# Altium PCB 24V_5V_Buck.PcbDoc
Units mil, origin at the board's own origin, x right, y up, seen from the top; angles counter-clockwise.
Board outline 1350 x 900 mil, 2 copper layers (Top Layer, Bottom Layer); 15 components, 9 nets, 45 pads, 0 vias.
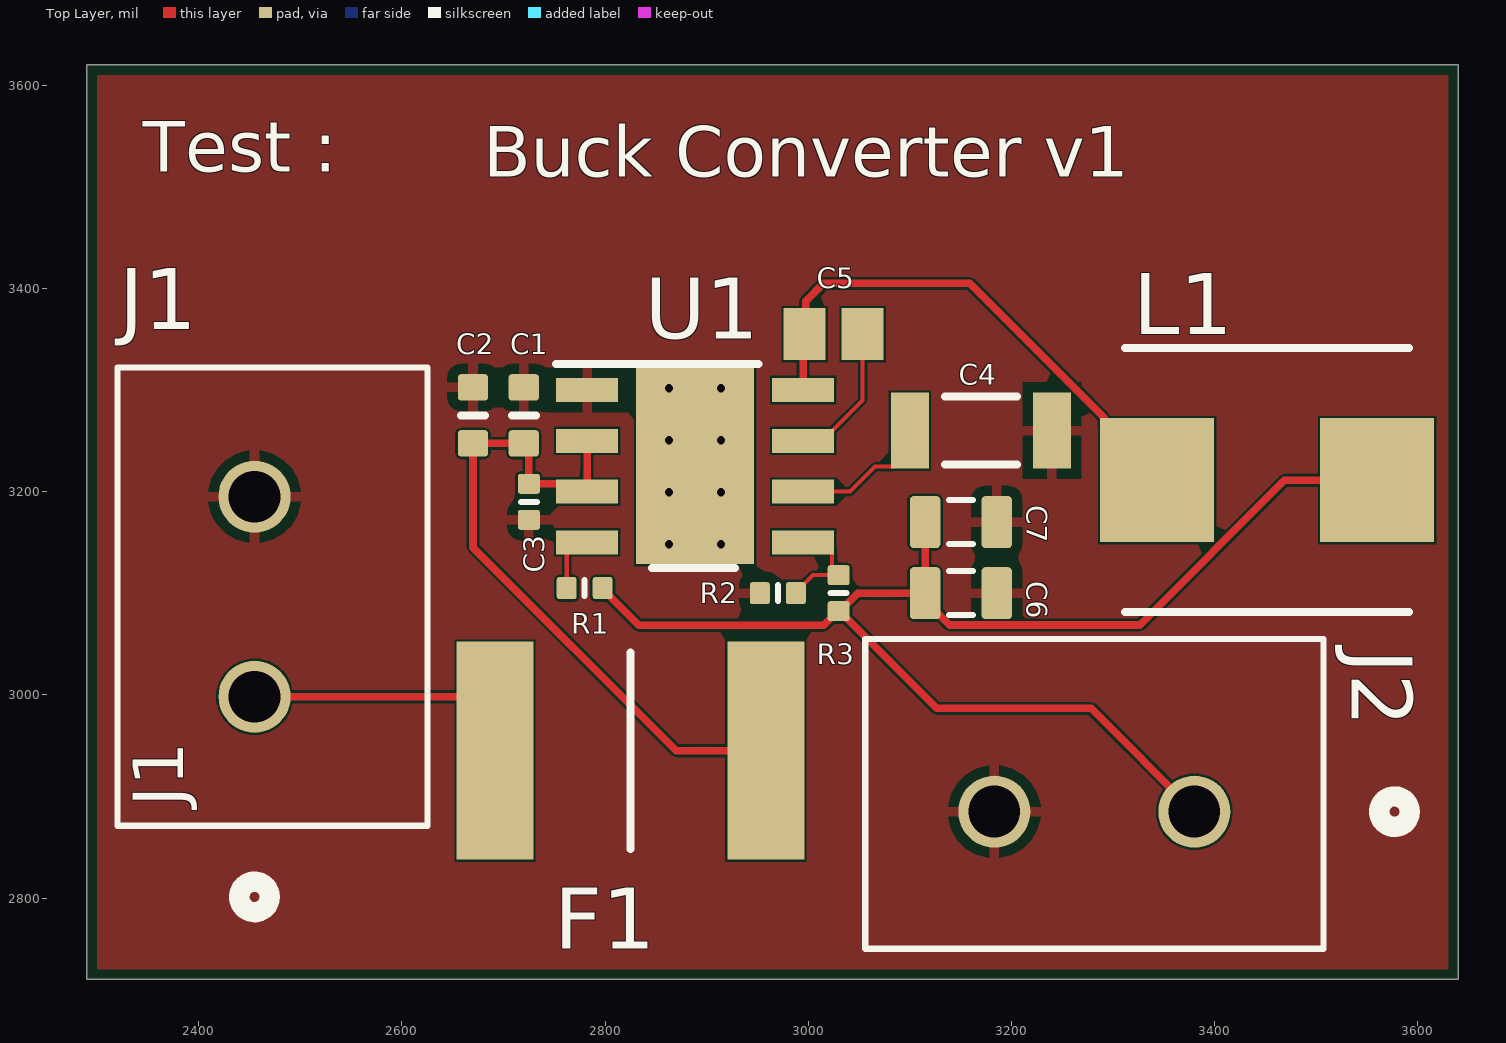
[diagram p0: Top Layer view]
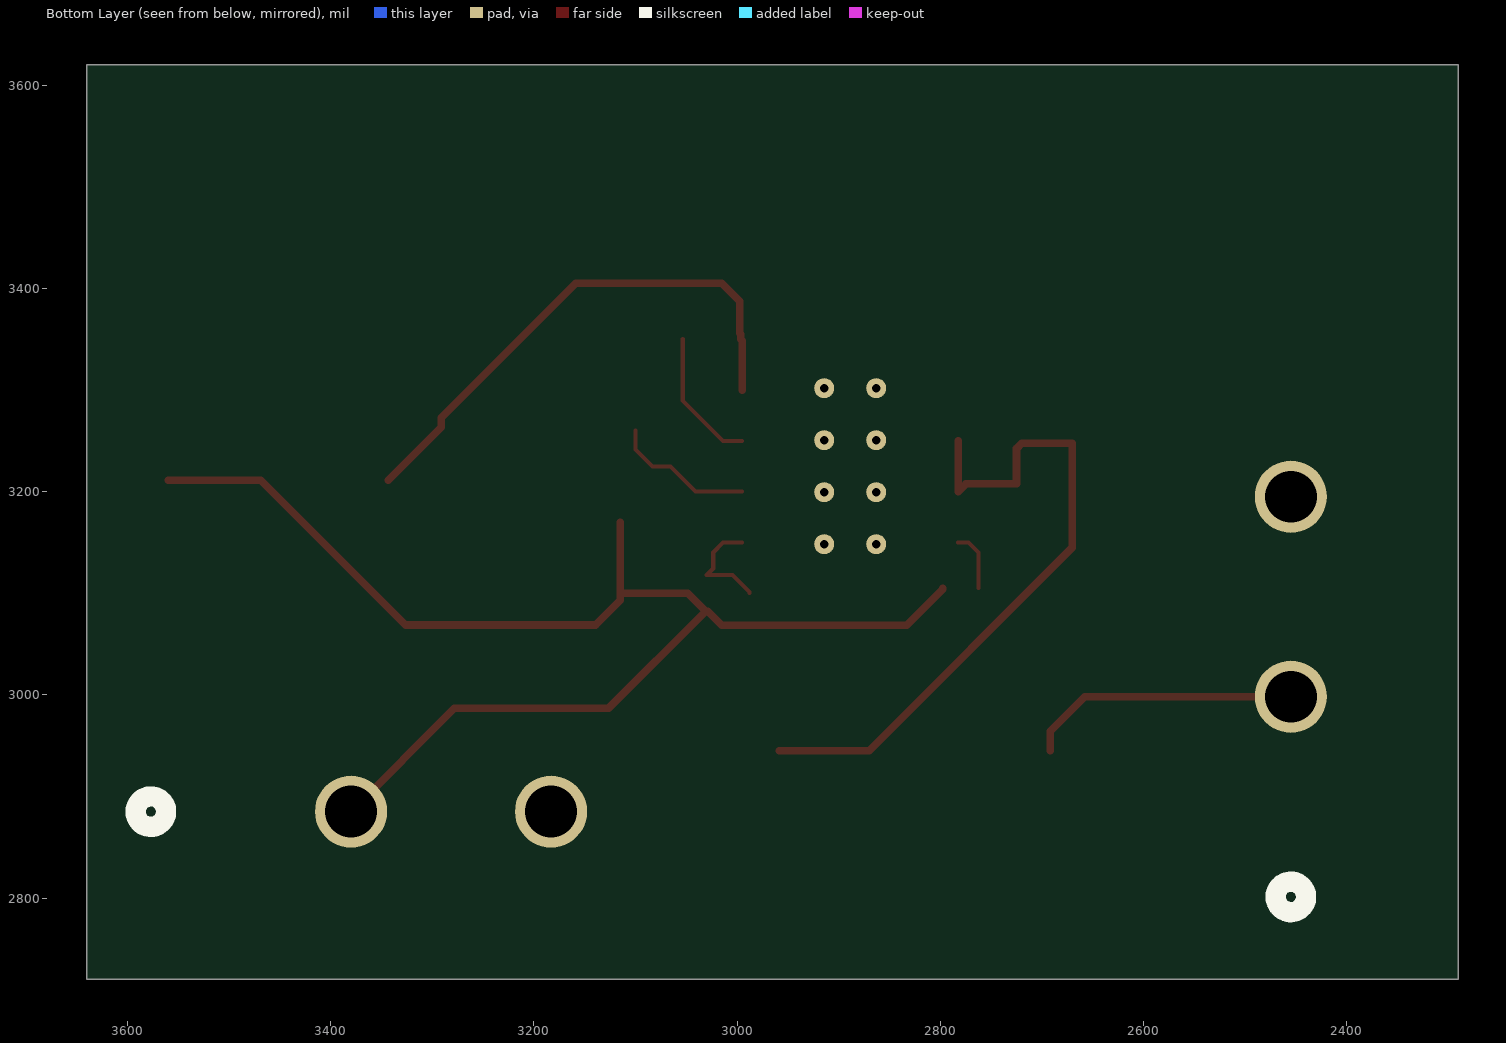
[diagram p1: Bottom Layer view, seen from below]
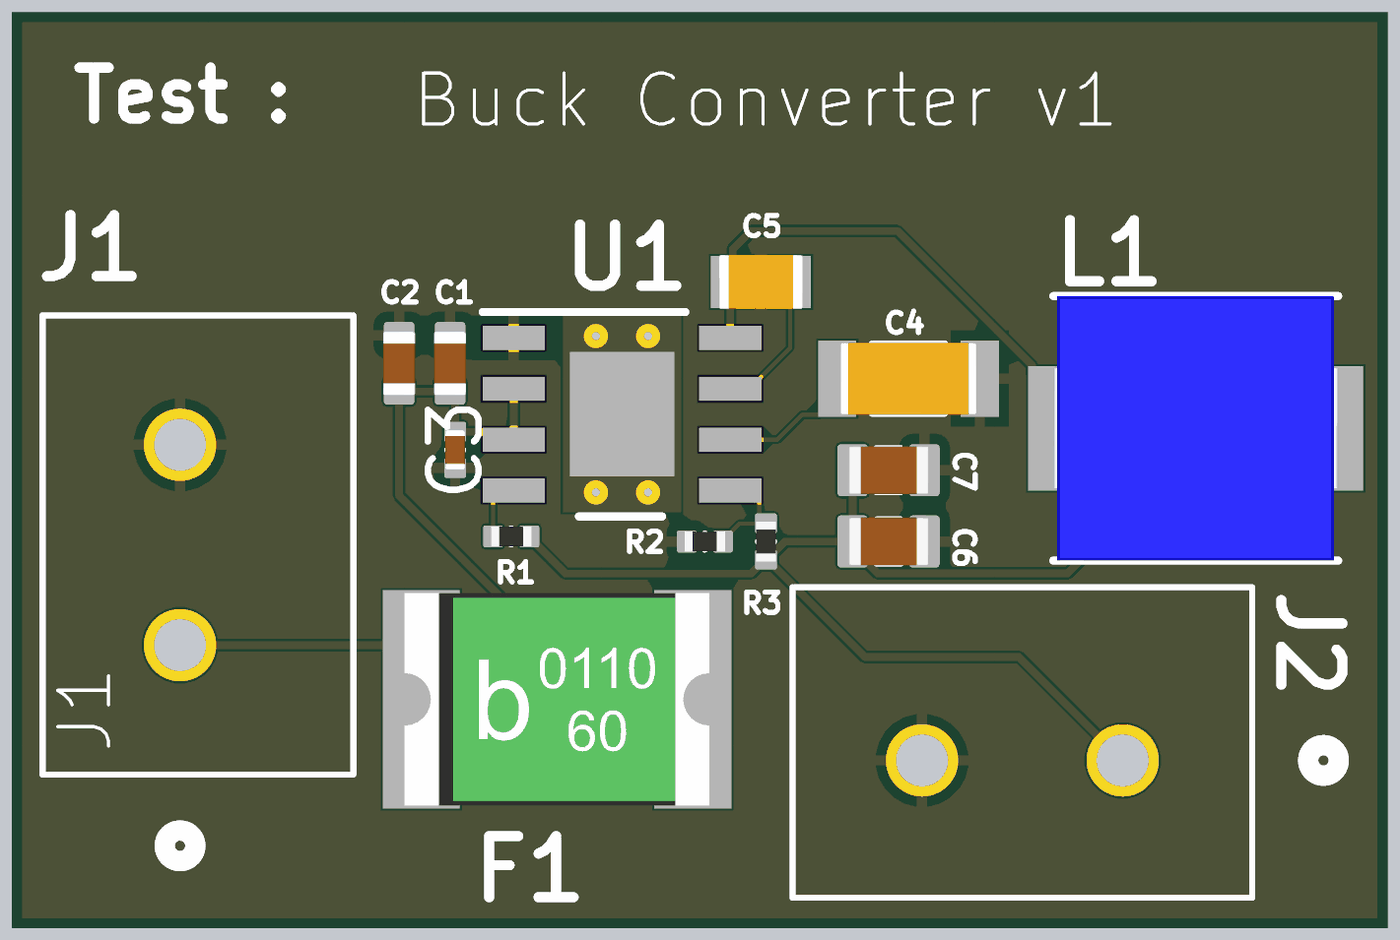
[diagram p2: 3D render of the assembled board from above, using the file's embedded part models]

## Layer stack, top to bottom
Top Solder: solder mask 0.4, Solder Resist, Dk 3.5
Top Layer: signal copper 1.4
Dielectric 1: dielectric 12.6, FR-4, Dk 4.8
Bottom Layer: signal copper 1.4
Bottom Solder: solder mask 0.4, Solder Resist, Dk 3.5

## Board outline
2290,2720 3640,2720 3640,3620 2290,3620

## Design rules (kind name [scope] priority, off if disabled: settings)
Clearance [All] p1: gap=2 ignorepadtopadclearanceinfootprint=FALSE
ComponentClearance [All] p1: gap=10 collisioncheckmode=3 verticalgap=10 showdistances=TRUE
MinimumSolderMaskSliver [All] p1: minsoldermaskwidth=3
PolygonConnect [All] p1: connectstyle=Relief reliefconductorwidth=10 reliefentries=4 polygonreliefangle="90 Angle" airgapwidth=10
RoutingVias [All] p1: holewidth=28 width=50 viastyle="Through Hole" minholewidth=28 minwidth=50 maxholewidth=28 maxwidth=50
SilkToSilkClearance [All] p1: silktosilkclearance=1
SilkToSolderMaskClearance [IsPad] p1: minsilkscreentomaskgap=1 clearancetoexposedcopper=TRUE
SolderMaskExpansion [All] p1: expansion=0 istentingtop=FALSE
SupplyNets "Schematic Supply Nets" [InNet('GND')] p1: voltage=0.000
Width Power [(InNet('NetF1_1') OR InNet('NetC6_1')) OR InNet('NetC1_1')] p1: maxlimit=20 minlimit=7.5 preferedwidth=12.5 minimp=50.000000 maximp=50.000000 favimp=50.000000
Width SW [InNet('NetC5_2')] p2: maxlimit=12.5 minlimit=5 preferedwidth=7.5 minimp=50.000000 maximp=50.000000 favimp=50.000000
Width [InNetClass('All Nets')] p3: maxlimit=4 minlimit=1.5 preferedwidth=2.5 minimp=50.000000 maximp=50.000000 favimp=50.000000
26 further rules are at their usual default settings.

## Components (designator, comment, footprint, x,y, rotation, side; value= is the part's Value field where it differs from the comment)
C1 "Capacitor 4.7µF +/-20% 10V 0603" CAPC0603(1608)100_L 2720,3275 r90 top value=4.7µF
C2 "Capacitor 4.7µF +/-20% 10V 0603" CAPC0603(1608)100_L 2670,3275 r90 top value=4.7µF
C3 "Capacitor 220nF +/-20% 10V 0402" CAPC0402(1005)60_L 2725,3190 r270 top value=220nF
C4 "Capacitor 1 uF +/- 10% 25 V 1206" CAPC3216X180X20ML20 3169.88,3260 r0 top value=1µF
C5 "Capacitor 100 nF +/-10% 50 V 0805" CAPC2013X95X50LL10T25 3025,3355 r180 top value=100nF
C6 "Capacitor 22µF +/-40% 16V 0805" CAPC0805(2012)145_L 3150.43,3100 r0 top value=22µF
C7 "Capacitor 22µF +/-40% 16V 0805" CAPC0805(2012)145_L 3150.43,3170 r0 top value=22µF
F1 "0ZCF0110AF2A" FUSC7451X170N 2825,2945 r0 top
J1 "Terminal Block" CONN2_2710002_WRE 2455,2998.15 r90 top
J2 "Terminal Block" CONN2_2710002_WRE 3380,2885 r180 top
L1 "SRP7028AA-100M" INDPM7166X300N 3451.74,3211.19 r0 top
R1 "Resistor 100K +/-1 % 0402 63 mW" RESC0402(1005)_L 3030,3100 r270 top value=100k
R2 "Resistor 100K +/-1 % 0402 63 mW" RESC0402(1005)_L 2970,3100 r180 top value=24.9k
R3 "Resistor 100K +/-1 % 0402 63 mW" RESC0402(1005)_L 2780,3105 r0 top value=100k
U1 "LMR36520FADDAR" DDA0008J 2888.7,3225 r0 top

## Footprints (in the part's own frame and the unit in brackets; to place one, negate y for a bottom-side part, rotate by r counter-clockwise, add the part's x,y. Pads: shape width x height; smd on the part's side, far side on the other; paste and mask are expansions set on the pad)
CAPC0402(1005)60_L [mm] "Chip Capacitor, Body 1.0x0.5mm, Height 0.6mm, IPC High Density"
  rrect25% 0.5x0.55 smd: 1(-0.45,0) 2(0.45,0)
  silkscreen extent 0,-0.2 0,0.2, body extent -0.5,-0.25 0.5,0.25, height 0.6
CAPC0603(1608)100_L [mm] "Chip Capacitor, Body 1.6x0.8mm, Height 1.0mm, IPC High Density"
  rrect25% 0.66x0.76 smd: 1(-0.7,0) 2(0.7,0)
  silkscreen extent 0,-0.3 0,0.3, body extent -0.8,-0.4 0.8,0.4, height 0.95
CAPC0805(2012)145_L [mm] "Chip Capacitor, Body 2.0x1.2mm, Height 1.45mm, IPC High Density"
  rrect25% 0.76x1.3 smd: 1(-0.9,0) 2(0.89,0)
  silkscreen extent -0.3,-0.55 0.3,0.55, body extent -1,-0.6 1,0.6, height 1.45
CAPC2013X95X50LL10T25 [mm] "Chip Capacitor, 2-Leads, Body 2.10x1.35mm, IPC High Density"
  rect 1.05x1.3 smd: 1(-0.725,0) 2(0.725,0)
  body extent -1.05,-0.67 1.05,0.67, height 0.95
CAPC3216X180X20ML20 [mm] "Chip Capacitor, 2-Leads, Body 3.40x1.80mm, IPC Low Density"
  rect 0.95x1.9 smd: 1(-1.775,0) 2(1.775,0)
  silkscreen extent -0.9,-0.85 0.9,0.85, body extent -1.7,-0.9 1.7,0.9, height 1.8
CONN2_2710002_WRE [mil]
  round 71 hole 51 paste-99999 mask+0: 1(0,0) 2(196.85,0)
  silkscreen extent -212,-170 324,135
DDA0008J [mm]
  rect 1.55x0.6 smd paste+0 mask+0.051: 1(-2.7,1.905) 2(-2.7,0.635) 3(-2.7,-0.635) 4(-2.7,-1.905) 5(2.7,-1.905) 6(2.7,-0.635) 7(2.7,0.635) 8(2.7,1.905)
  rect 2.95x4.9 smd paste-2.437 mask-2.438: 9(0,0)
  round 0.5 / inner round 1.524 / far side round 0.5 hole 0.203 paste-2539.97 mask+0.051: 10(-0.65,0.65) 11(0.65,0.65) 12(-0.65,-0.65) 13(0.65,-0.65) 14(-0.65,-1.95) 15(0.65,-1.95) 16(-0.65,1.95) 17(0.65,1.95)
  silkscreen extent -3.47,-2.55 1.58,2.55
FUSC7451X170N [mm]
  rect 1.92x5.45 smd: 1(-3.385,0) 2(3.385,0)
  silkscreen extent 0,-2.46 0,2.46, body extent -3.8,-2.65 3.8,2.65, height 1.05
INDPM7166X300N [mm]
  rect 2.85x3.1 smd: 1(-2.75,0) 2(2.75,0)
  silkscreen extent -3.55,-3.3 3.55,3.3, body extent -3.55,-3.3 3.55,3.3, height 3
RESC0402(1005)_L [mm] "Chip Resistor, Body 1.0x0.5mm, IPC High Density"
  rrect25% 0.5x0.55 smd: 1(-0.45,0) 2(0.45,0)
  silkscreen extent 0,-0.2 0,0.2, body extent -0.5,-0.25 0.5,0.25, height 0.3

## Part data
C1 C2: library part CMP-001-00076-4, "Chip Capacitor, 4.7µF +/-20%, 10V, 0603, Thickness 1 mm", Case/Package=0603, Max Operating Temperature=85°C, Min Operating Temperature=-55°C, Tolerance=10%, Voltage Rating=10V, Mounting Technology=SMT, Pins=2
C3: library part CMP-001-00057-3, "Chip Capacitor, 220nF +/-20%, 10V, 0402, Thickness 0.6 mm", Case/Package=0402, Max Operating Temperature=85°C, Min Operating Temperature=-55°C, Tolerance=10%, Voltage Rating=10V, Mounting Technology=SMT, Pins=2
C4: library part CMP-001-00006-6, "Chip Capacitor, 1 uF, +/- 10%, 25 V, 1206 (3216 Metric)", Capacitor Type=Ceramic, Case/Package=1206, Max Operating Temperature=125°C, Min Operating Temperature=-55°C, Tolerance=10%, Voltage Rating=25V, Mounting Technology=SM, Pins=2, RoHS Compliant=True
C5: library part CMP-001-00018-6, "Chip Capacitor, 100 nF, +/- 10%, 50 V, 0805 (2012 Metric)", Capacitor Type=Ceramic, Case/Package=0805, Max Operating Temperature=125°C, Min Operating Temperature=-55°C, Tolerance=10%, Voltage Rating=50V, Mounting Technology=SM, Pins=2, RoHS Compliant=True
C6 C7: library part CMP-001-00081-4, "Chip Capacitor, 22µF +/-40%, 16V, 0805, Thickness 1.45 mm", Case/Package=0805, Max Operating Temperature=85°C, Min Operating Temperature=-55°C, Tolerance=5%, Voltage Rating=16V, Mounting Technology=SMT, Pins=2
F1: "Resettable Fuse", Manufacturer_Name="Bel Circuit Protection", Arrow Part Number=0ZCF0110AF2A, Arrow Price/Stock=https://www.arrow.com/en/products/0zcf0110af2a/bel-group?utm_currency=USD&region=europe, Datasheet Link=https://belfuse.com/resources/datasheets/circuitprotection/ds-cp-0zcf-series.pdf, Height=1.7mm, Manufacturer_Part_Number=0ZCF0110AF2A
J1 J2: library part 691102710002, "WR-TBL Terminal block - Wire protector - THT", Manufacturer_Name="Wurth Electronics", Copyright="Copyright (C) 2026 Ultra Librarian. All rights reserved.", Manufacturer_Part_Number=691102710002, RefDes=RefDes, Type="Wire to Board"
L1: "Inductor", Manufacturer_Name=Bourns, Mouser Part Number=652-SRP7028AA-100M, Arrow Part Number=SRP7028AA-100M, Arrow Price/Stock=https://www.arrow.com/en/products/srp7028aa-100m/bourns.html?utm_currency=USD&region=nac, Datasheet Link=https://www.bourns.com/docs/Product-Datasheets/SRP7028AA.pdf, Height=3mm, Manufacturer_Part_Number=SRP7028AA-100M, Mouser Price/Stock=https://www.mouser.co.uk/ProductDetail/Bourns/SRP7028AA-100M?qs=CiayqK2gdcLCkUvULW7S2A%3D%3D
R1 R3: library part CMP-009-00168-3, "Chip Resistor, 100 kOhms, +/-1 %, 63 mW, -55 to 155 degC, 0402", Case/Package=0402, Max Operating Temperature=155°C, Min Operating Temperature=-55°C, Power=63mW, Tolerance=1%, Pins=2
R2: library part CMP-009-00171-3, "Chip Resistor, 24,9 kOhms, +/-1 %, 63 mW, -55 to 155 degC, 0402", Case/Package=0402, Max Operating Temperature=155°C, Min Operating Temperature=-55°C, Power=63mW, Tolerance=1%, Pins=2
U1: "SIMPLE SWITCHER&reg; 4.2-V to 65-V, 2-A synchronous step-down converter with 26-uA IQ 8-SO PowerPAD -40 to 125", Manufacturer_Name="Texas Instruments", Copyright="Copyright (C) 2025 Ultra Librarian. All rights reserved.", Manufacturer_Part_Number=LMR36520FADDAR, RefDes=RefDes, Type=TYPE

## Nets (pads, with @x,y where several pads share a name; then routed paths per layer and width w, separated by ;. In a path a pad name is that pad's centre, name@x,y a point inside that pad or via, vN(x,y) a via of type N, cw(c..) or ccw(c..) an arc to the next point about the centre after c; other vN are vias at no path point)
GND: C1.2 C2.2 C3.2 C4.2 C6.2 C7.2 J1.2 J2.2 R2.2 U1.1
NetC1_1: C1.1 C2.1 C3.1 F1.2 U1.2 U1.3 | length 675.9
  Top Layer w7.5: U1.2 U1.3 2774.69,3207.72 C3.1 2725,3242.44 C1.1 C2.1 2670,3145 2870,2945 F1.2
NetC4_1: C4.1 U1.6 | length 140.8
  Top Layer w4: U1.6 3041.11,3200 3065.7,3224.6 3083.3,3224.6 3100,3241.3 C4.1
NetC5_1: C5.1 U1.7 | length 135.2
  Top Layer w4: U1.7 3013.7,3250 3053.54,3289.84 C5.1@3053.54,3350
NetC5_2: C5.2 L1.1 U1.8 | length 527.4
  Top Layer w7.5: U1.8 2995,3348.54 2996.46,3350 C5.2@2996.46,3354.92 ; C5.2 2997.45,3355.99 2997.45,3387.45 3015,3405 3159,3405 3291.12,3272.88 3291.12,3263.54 L1.1
NetC6_1: C6.1 C7.1 J2.1 L1.2 R1.2 R3.2 | length 1368.8
  Top Layer w7.5: R3.2 2797.72,3104.02 2833.24,3068.49 3015.22,3068.49 3029.02,3082.28 R1.2@3030.98,3082.28 ; R1.2 R1.2@3030.98,3082.28 ; C7.1 C6.1 ; J2.1 3278.33,2986.67 3126.6,2986.67 R1.2@3030.98,3082.28 ; L1.2 3468.73,3211.19 3326.2,3068.66 3139.45,3068.66 3115,3093.11 C6.1 ; R1.2@3030.98,3082.28 3048.7,3100 C6.1
NetF1_1: F1.1 J1.1 | length 269.9
  Top Layer w7.5: J1.1 2657.69,2998.15 2691.73,2964.1 F1.1
NetR1_1: R1.1 R2.1 U1.5 | length 107.9
  Top Layer w4: R2.1 2987.72,3100.98 3004.45,3117.72 R1.1 3023.51,3124.2 3023.51,3140.19 3013.7,3150 U1.5
NetR3_1: R3.1 U1.4 | length 59.4
  Top Layer w4: R3.1 2762.28,3140.19 2772.09,3150 U1.4
pads on no net: U1.9 U1.10 U1.11 U1.12 U1.13 U1.14 U1.15 U1.16 U1.17

## Polygon pours and split planes (outlines as drawn)
GND on Top Layer "GND_L01_P000" (solid, pour order 0): 2300,3610 3630,3610 3630,2730 2300,2730

## Text inside footprints (layer, text, board x,y; h text height)
U1: Top Overlay "Test :" at 2345,3515 h50; Top Overlay "Buck Converter v1" at 2680,3510 h50